# Altium PCB HandHeld_Terminal_V2_Rev3.PcbDoc (part 1 of 2)
Units mil, origin at the board's own origin, x right, y up, seen from the top; angles counter-clockwise.
Board outline 3031.5 x 1889.76 mil, 4 copper layers (Top Layer, GND_02, PWR_03, Bottom Layer), stack 63.307 mil thick; 122 components, 81 nets, 452 pads, 291 vias.
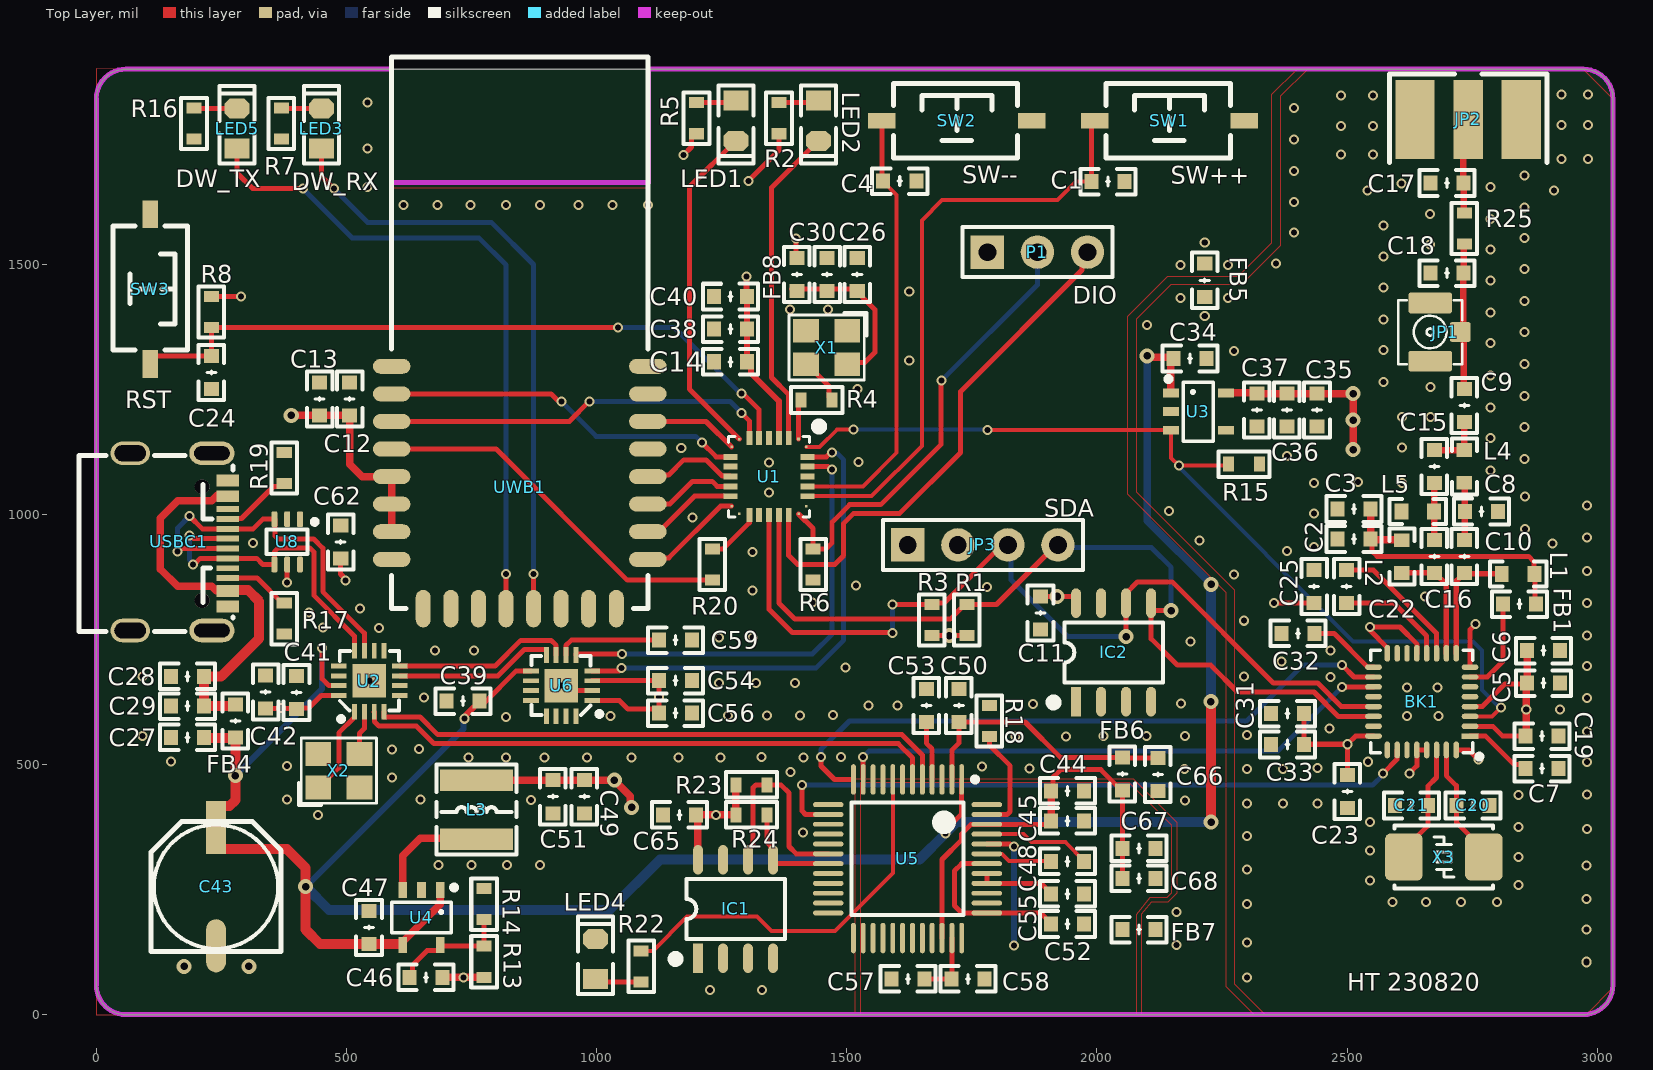
[diagram p0: Top Layer view]
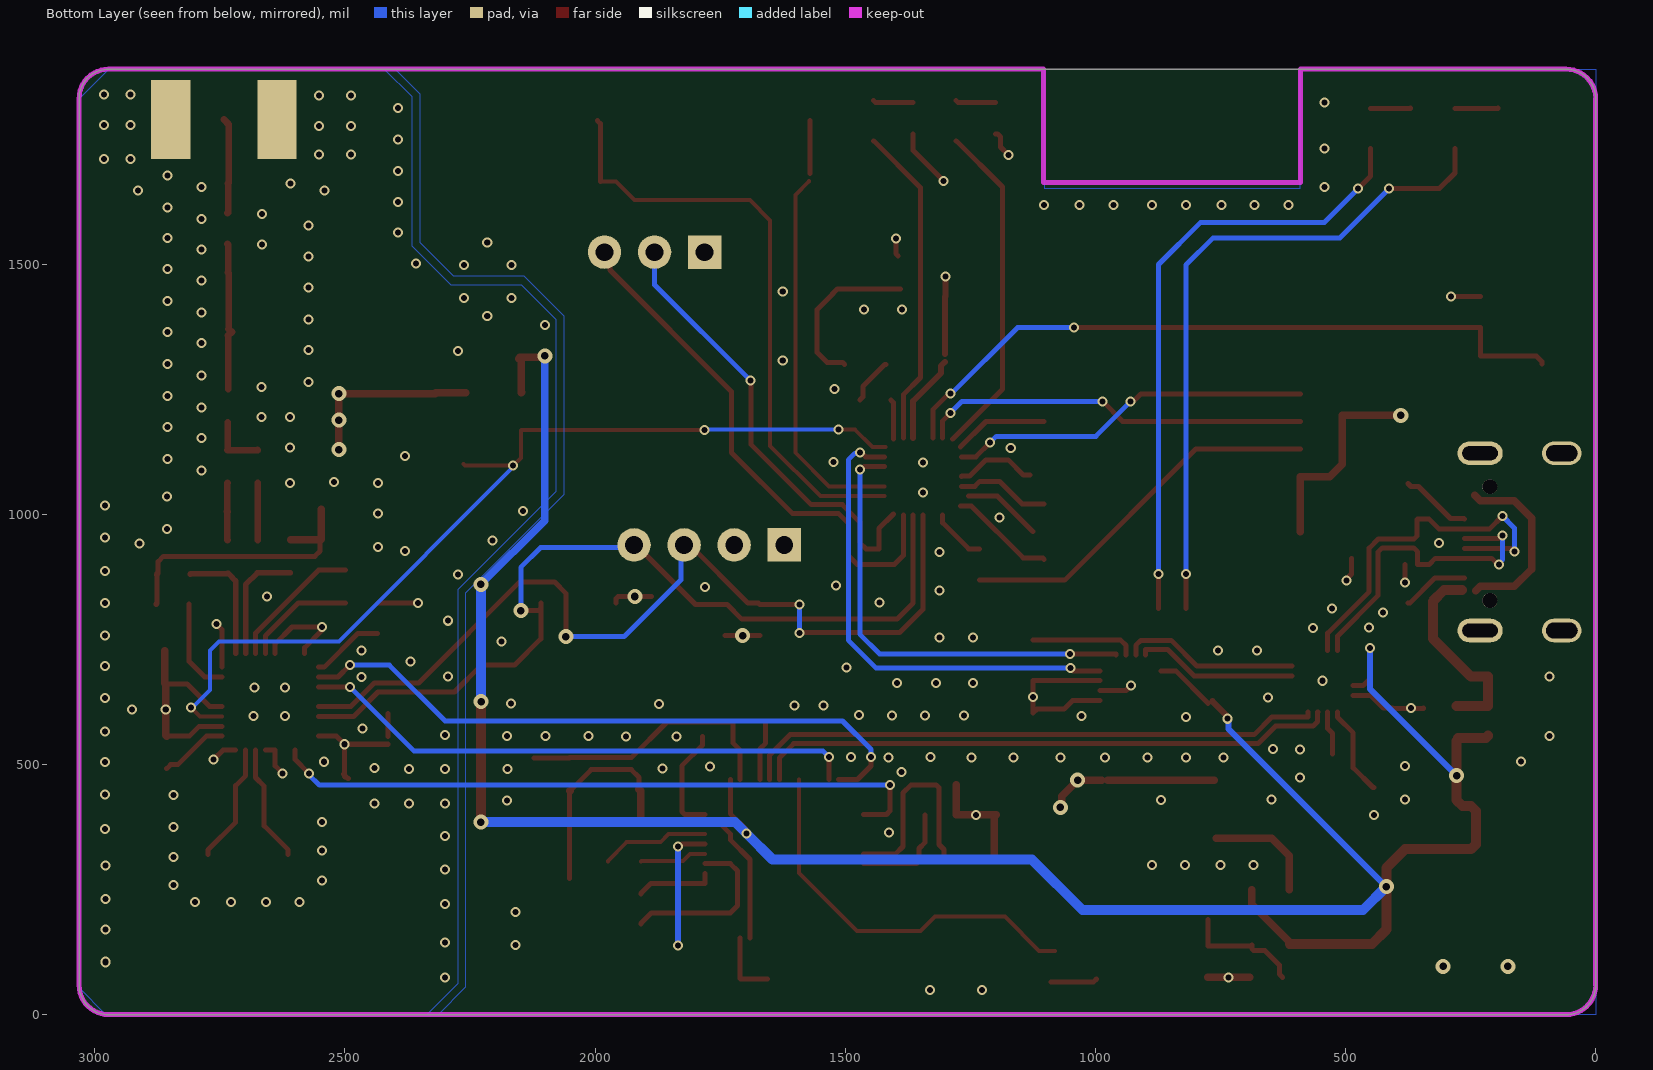
[diagram p1: Bottom Layer view, seen from below]
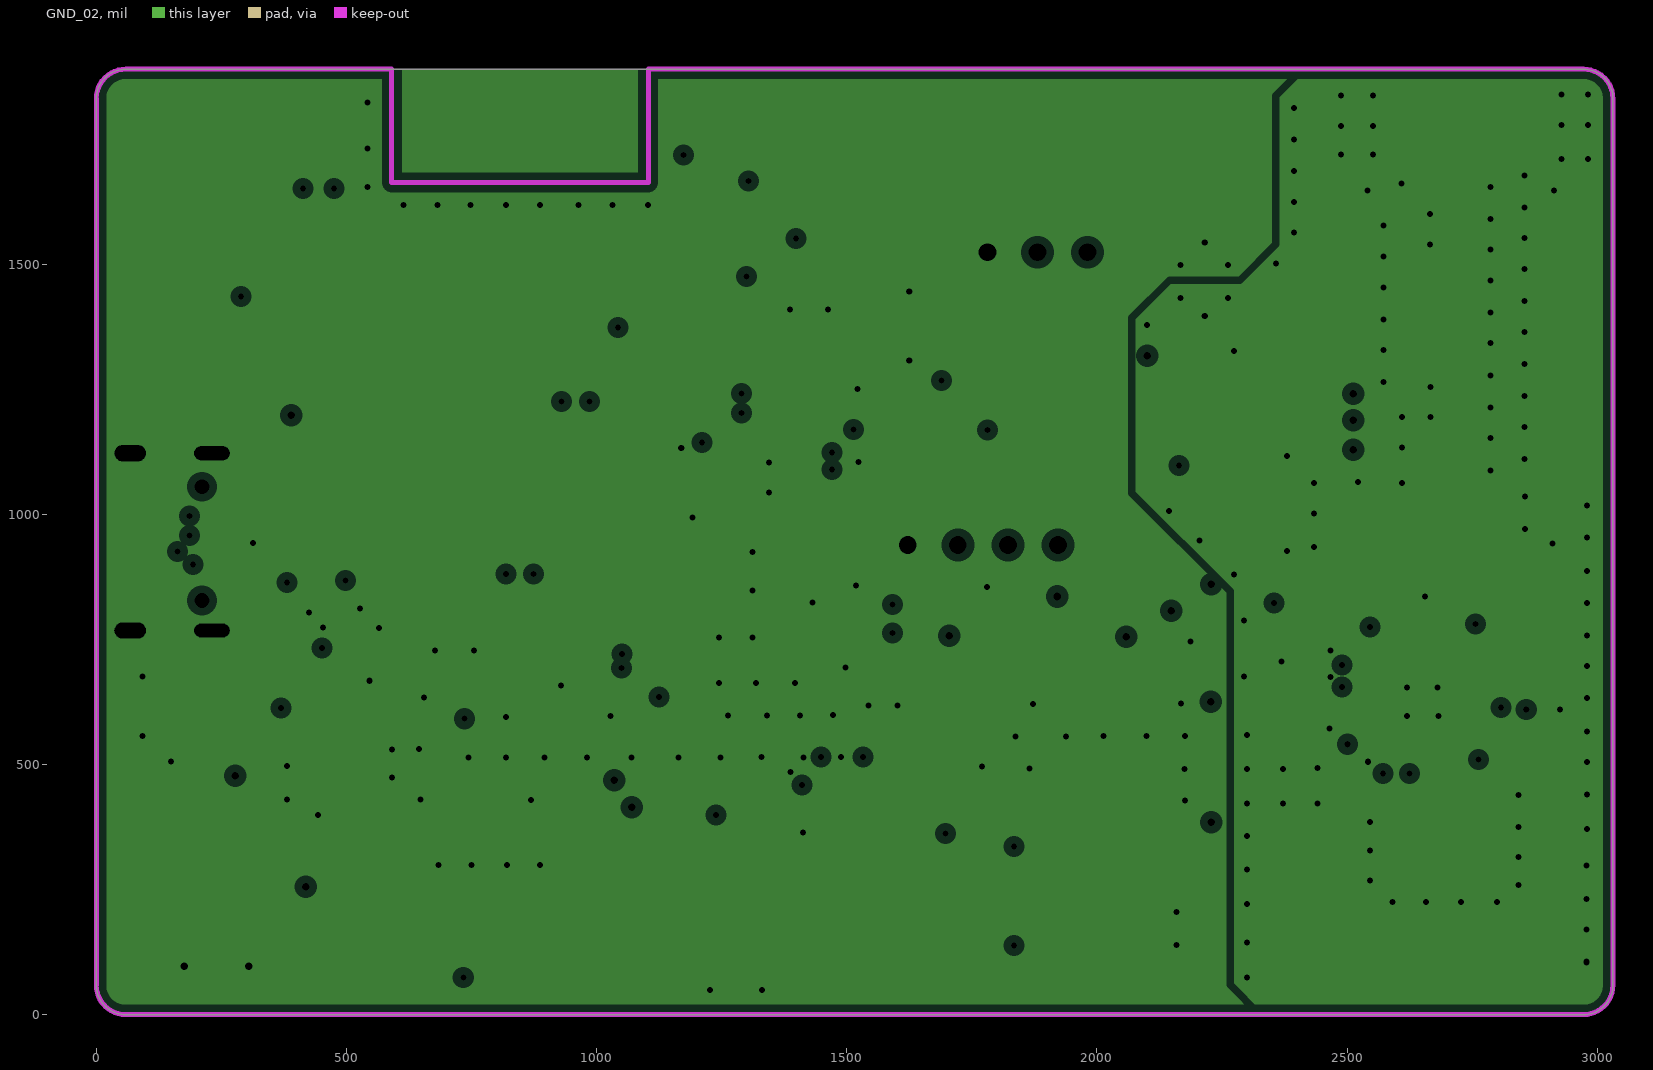
[diagram p2: GND_02, clearances drawn from the general rule]
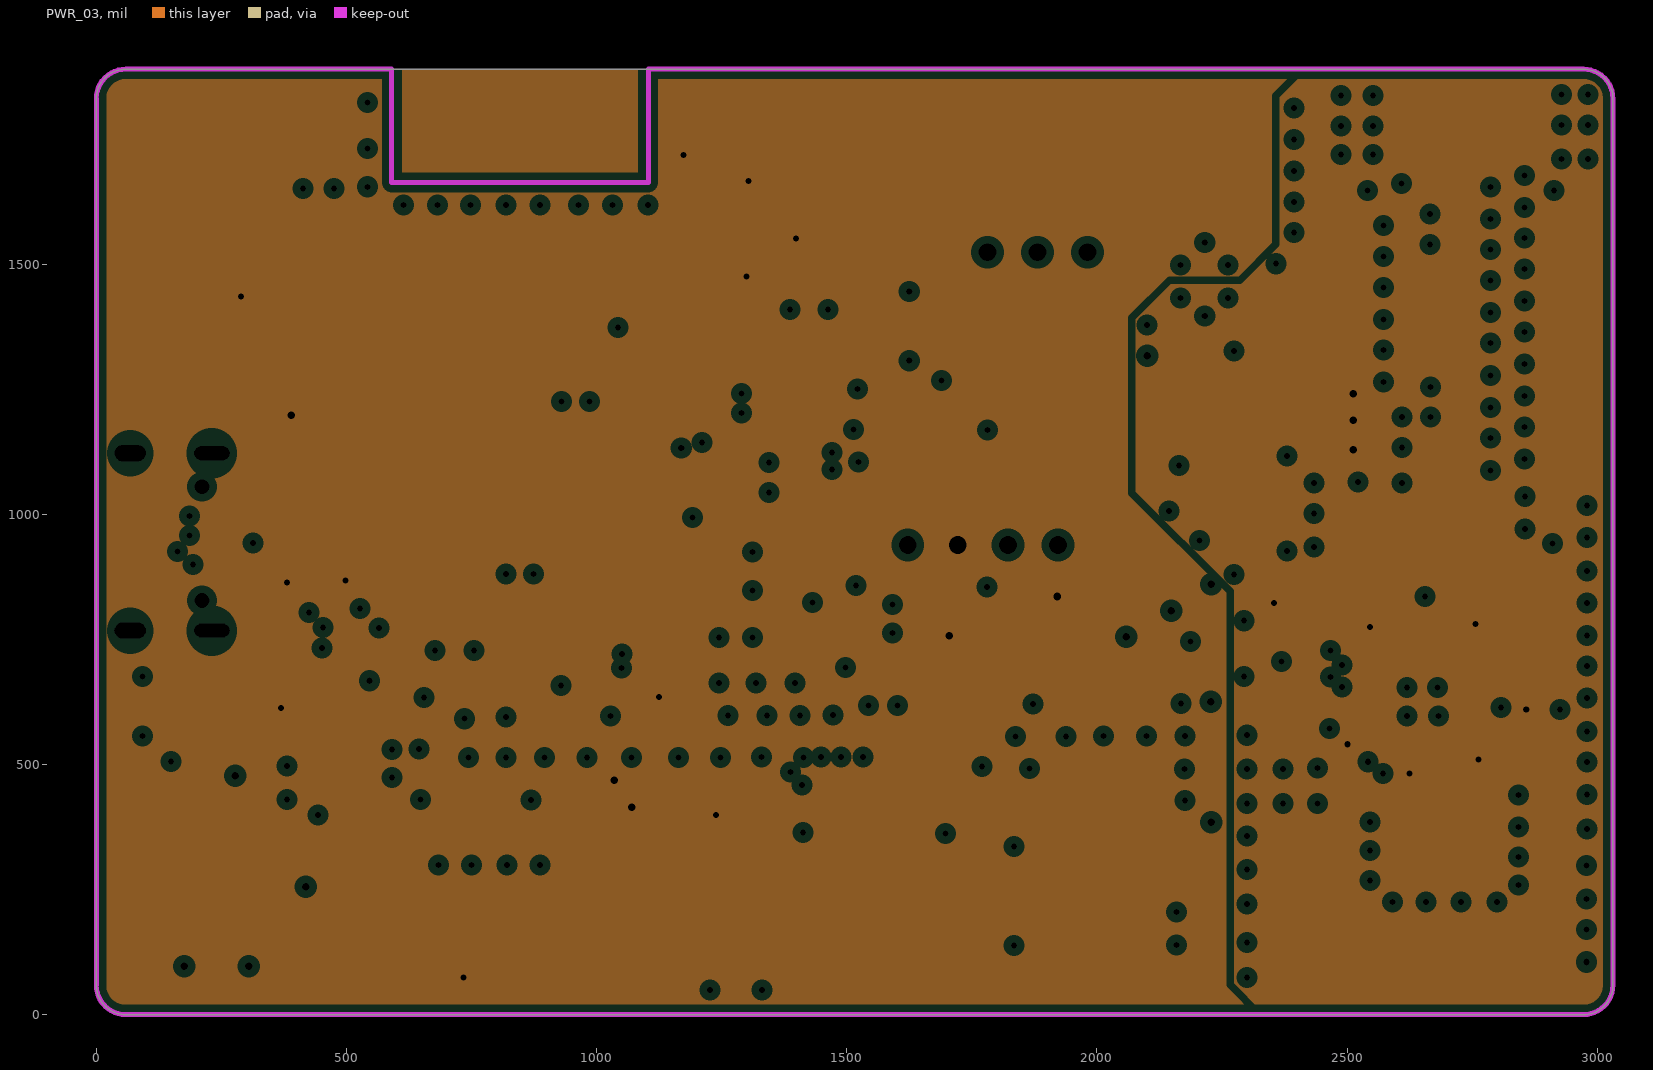
[diagram p3: PWR_03, clearances drawn from the general rule]

## Layer stack, top to bottom
Top Solder: solder mask 0.4, Solder Resist, Dk 3.5
Top Layer: signal copper 1.4
Dielectric 2: prepreg 8.6, PP-023, Dk 4.5
GND_02: plane copper 0.689, net GND
Dielectric 1: dielectric 41.9291, FR-4, Dk 4.8
PWR_03: plane copper 0.689, net (Multiple Nets)
Dielectric 3: prepreg 8.6, PP-023, Dk 4.5
Bottom Layer: signal copper 1.4
Bottom Solder: solder mask 0.4, Solder Resist, Dk 3.5

## Board outline
0,59.06 0,1830.71 cw(c59.06,1830.71) 59.06,1889.76 2972.44,1889.76 cw(c2972.44,1830.71) 3031.5,1830.71 3031.5,59.06 cw(c2972.44,59.06) 2972.44,0 59.06,0 cw(c59.06,59.06)

## Design rules (kind name [scope] priority, off if disabled: settings)
AssemblyTestPointUsage [All] p0: scope1count=1 scope1_0_kind=Board scope1_0_value=Board scope2count=1 scope2_0_kind=Board scope2_0_value=Board commentlength=0
AssemblyTestpoint [All] p0: scope1count=1 scope1_0_kind=Board scope1_0_value=Board scope2count=1 scope2_0_kind=Board scope2_0_value=Board commentlength=0
Clearance [All] p0: scope1count=1 scope1_0_kind=Board scope1_0_value=Board scope2count=1 scope2_0_kind=Board scope2_0_value=Board commentlength=0 gap=8
Clearance Frame_Shrink [All] p0 off: scope1count=1 scope1_0_kind=Layer scope1_0_value=TOP scope2count=1 scope2_0_kind=Board scope2_0_value=Board commentlength=48 gap=20 // Protel DXP Scope 2 Expression Was: InPolygon
Clearance Chip_Pin [All] p0: scope1count=1 scope1_0_kind=Component scope1_0_value=BK1','USBC1','U1 scope2count=1 scope2_0_kind=Board scope2_0_value=Board commentlength=0 gap=6
Clearance RF_Pour_Clearance [All] p0 off: scope1count=1 scope1_0_kind=NetClass scope1_0_value=RF scope2count=1 scope2_0_kind=Board scope2_0_value=Board commentlength=48 gap=15 // Protel DXP Scope 2 Expression Was: InPolygon
Clearance RF_Pour_Clearance [InNetClass('RF') vs InPolygon] p1: gap=15 ignorepadtopadclearanceinfootprint=TRUE
Clearance Chip_Pin [InComponent('BK1','USBC1','U1')] p2: gap=6 ignorepadtopadclearanceinfootprint=TRUE
Clearance Frame_Shrink [OnLayer('Keep-Out Layer') vs InPolygon] p3: gap=20 ignorepadtopadclearanceinfootprint=FALSE
Clearance [All] p4: gap=8 ignorepadtopadclearanceinfootprint=TRUE
ComponentClearance [All] p0: scope1count=1 scope1_0_kind=Board scope1_0_value=Board scope2count=1 scope2_0_kind=Board scope2_0_value=Board commentlength=0 gap=10 collisioncheckmode=3
DiffPairsRouting [All] p0: scope1count=1 scope1_0_kind=Board scope1_0_value=Board scope2count=1 scope2_0_kind=Board scope2_0_value=Board commentlength=0
DiffPairsRouting [All] p1: maxlimit=10 minlimit=10 mostfreqgap=10 toplayer_minwidth=8 toplayer_maxwidth=15 toplayer_prefwidth=8 bottomlayer_minwidth=8 bottomlayer_maxwidth=15 bottomlayer_prefwidth=8 maxuncoupledlength=500
FabricationTestPointUsage [All] p0: scope1count=1 scope1_0_kind=Board scope1_0_value=Board scope2count=1 scope2_0_kind=Board scope2_0_value=Board commentlength=0 valid=0 allowmultiple=FALSE
FabricationTestpoint [All] p0: scope1count=1 scope1_0_kind=Board scope1_0_value=Board scope2count=1 scope2_0_kind=Board scope2_0_value=Board commentlength=0 side=3 testpointundercomponent=TRUE minsize=40 maxsize=100 preferedsize=60 minholesize=0 maxholesize=40 preferedholesize=32 testpointgrid=1
FanoutControl Fanout_Default [All] p0: scope1count=1 scope1_0_kind=Board scope1_0_value=Board scope2count=1 scope2_0_kind=Board scope2_0_value=Board commentlength=30 // Fanout_Default (Default Rule)
FanoutControl Fanout_Small [All] p0 off: scope1count=1 scope1_0_kind=Board scope1_0_value=Board scope2count=1 scope2_0_kind=Board scope2_0_value=Board commentlength=84 // Protel DXP Scope 1 Expression Was: (CompPinCount < 5)   Fanout_Small (Default Rule)
FanoutControl Fanout_SOIC [All] p0 off: scope1count=1 scope1_0_kind=Board scope1_0_value=Board scope2count=1 scope2_0_kind=Board scope2_0_value=Board commentlength=71 // Protel DXP Scope 1 Expression Was: IsSOIC   Fanout_SOIC (Default Rule)
FanoutControl Fanout_LCC [All] p0 off: scope1count=1 scope1_0_kind=Board scope1_0_value=Board scope2count=1 scope2_0_kind=Board scope2_0_value=Board commentlength=69 // Protel DXP Scope 1 Expression Was: IsLCC   Fanout_LCC (Default Rule)
FanoutControl Fanout_BGA [All] p0 off: scope1count=1 scope1_0_kind=Board scope1_0_value=Board scope2count=1 scope2_0_kind=Board scope2_0_value=Board commentlength=69 // Protel DXP Scope 1 Expression Was: IsBGA   Fanout_BGA (Default Rule)
Height [All] p0: scope1count=1 scope1_0_kind=Board scope1_0_value=Board scope2count=1 scope2_0_kind=Board scope2_0_value=Board commentlength=0
HoleSize [All] p0: scope1count=1 scope1_0_kind=Board scope1_0_value=Board scope2count=1 scope2_0_kind=Board scope2_0_value=Board commentlength=0 absolutevalues=TRUE maxlimit=100 minlimit=1 maxpercent=80.000 minpercent=20.000
HoleToHoleClearance [All] p0: scope1count=1 scope1_0_kind=Board scope1_0_value=Board scope2count=1 scope2_0_kind=Board scope2_0_value=Board commentlength=0
LayerPairs [All] p0: scope1count=1 scope1_0_kind=Board scope1_0_value=Board scope2count=1 scope2_0_kind=Board scope2_0_value=Board commentlength=0 enforce=TRUE
MatchedLengths DiffPair_MatchedLengths [All] p0 off: scope1count=1 scope1_0_kind=Board scope1_0_value=Board scope2count=1 scope2_0_kind=Board scope2_0_value=Board commentlength=64 tolerance=1000 amplitude=200 gap=20 style=90-Degree // Protel DXP Scope 1 Expression Was: InDifferentialPair ('UD')
MatchedLengths DiffPair_MatchedLengths [InDifferentialPair ('UD')] p1: tolerance=1000 checknetsindiffpair=FALSE checkdiffpairvsdiffpair=TRUE checkxsignals=TRUE checkothers=TRUE
MinimumSolderMaskSliver [All] p0: scope1count=1 scope1_0_kind=Board scope1_0_value=Board scope2count=1 scope2_0_kind=Board scope2_0_value=Board commentlength=0
MinimumSolderMaskSliver [All] p1: minsoldermaskwidth=0
NetAntennae [All] p0: scope1count=1 scope1_0_kind=Board scope1_0_value=Board scope2count=1 scope2_0_kind=Board scope2_0_value=Board commentlength=0
PasteMaskExpansion [All] p0: scope1count=1 scope1_0_kind=Board scope1_0_value=Board scope2count=1 scope2_0_kind=Board scope2_0_value=Board commentlength=0 expansion=0
PlaneClearance [All] p0: scope1count=1 scope1_0_kind=Board scope1_0_value=Board scope2count=1 scope2_0_kind=Board scope2_0_value=Board commentlength=0 clearance=15
PlaneClearance [All] p1: clearance=15
PlaneConnect [All] p0: scope1count=1 scope1_0_kind=Board scope1_0_value=Board scope2count=1 scope2_0_kind=Board scope2_0_value=Board commentlength=0 planeconnectstyle=Direct reliefexpansion=20 reliefentries=4 reliefconductorwidth=15 reliefairgap=10
PlaneConnect [All] p1: planeconnectstyle=Direct reliefexpansion=20 reliefentries=4 reliefconductorwidth=15 reliefairgap=10
PolygonConnect [All] p0: scope1count=1 scope1_0_kind=Board scope1_0_value=Board scope2count=1 scope2_0_kind=Board scope2_0_value=Board commentlength=0 connectstyle=Relief reliefconductorwidth=15 reliefentries=4 polygonreliefangle="90 Angle"
PolygonConnect PolygonConnect_RF [All] p0: scope1count=1 scope1_0_kind=ComponentClass scope1_0_value=RF_Comp scope2count=1 scope2_0_kind=Board scope2_0_value=Board commentlength=0 connectstyle=Direct reliefconductorwidth=10 reliefentries=4 polygonreliefangle="90 Angle"
PolygonConnect PolygonConnect_RF [InComponentClass('RF_Comp')] p1: connectstyle=Direct reliefconductorwidth=10 reliefentries=4 polygonreliefangle="90 Angle" airgapwidth=10
PolygonConnect [All] p2: thpad.connectstyle=Relief thpad.reliefconductorwidth=15 thpad.reliefentries=4 thpad.polygonreliefangle="90 Angle" thpad.airgapwidth=10 smdpad.connectstyle=Relief smdpad.reliefconductorwidth=10 smdpad.reliefentries=4 smdpad.polygonreliefangle="90 Angle" smdpad.airgapwidth=10 via.connectstyle=Direct via.reliefconductorwidth=10 via.reliefentries=4 via.polygonreliefangle="90 Angle" via.airgapwidth=10
RoutingCorners [All] p0: scope1count=1 scope1_0_kind=Board scope1_0_value=Board scope2count=1 scope2_0_kind=Board scope2_0_value=Board commentlength=0 cornerstyle=45-Degree minsetback=100 maxsetback=100
RoutingLayers [All] p0: scope1count=1 scope1_0_kind=Board scope1_0_value=Board scope2count=1 scope2_0_kind=Board scope2_0_value=Board commentlength=0 top layer=Automatic bottom layer=Automatic
RoutingPriority [All] p0: scope1count=1 scope1_0_kind=Board scope1_0_value=Board scope2count=1 scope2_0_kind=Board scope2_0_value=Board commentlength=0
RoutingTopology [All] p0: scope1count=1 scope1_0_kind=Board scope1_0_value=Board scope2count=1 scope2_0_kind=Board scope2_0_value=Board commentlength=0 topology=Shortest
RoutingVias [All] p0: scope1count=1 scope1_0_kind=Board scope1_0_value=Board scope2count=1 scope2_0_kind=Board scope2_0_value=Board commentlength=0 holewidth=12 width=20 viastyle="Through Hole" minholewidth=12 minwidth=18 maxholewidth=25 maxwidth=50
RoutingVias [All] p1: holewidth=12 width=20 viastyle="Through Hole" minholewidth=12 minwidth=18 maxholewidth=25 maxwidth=50
ShortCircuit [All] p0: scope1count=1 scope1_0_kind=Board scope1_0_value=Board scope2count=1 scope2_0_kind=Board scope2_0_value=Board commentlength=0 allowed=FALSE
SilkToBoardRegionClearance [All] p0: scope1count=1 scope1_0_kind=Board scope1_0_value=Board scope2count=1 scope2_0_kind=Board scope2_0_value=Board commentlength=0
SilkToSilkClearance [All] p0: scope1count=1 scope1_0_kind=Board scope1_0_value=Board scope2count=1 scope2_0_kind=Board scope2_0_value=Board commentlength=0
SilkToSilkClearance [All] p1: silktosilkclearance=0
SilkToSolderMaskClearance [All] p0 off: scope1count=1 scope1_0_kind=Board scope1_0_value=Board scope2count=1 scope2_0_kind=Board scope2_0_value=Board commentlength=44 // Protel DXP Scope 1 Expression Was: IsPad
SilkToSolderMaskClearance [IsPad] p1: minsilkscreentomaskgap=0 clearancetoexposedcopper=TRUE
SolderMaskExpansion [All] p0: scope1count=1 scope1_0_kind=Board scope1_0_value=Board scope2count=1 scope2_0_kind=Board scope2_0_value=Board commentlength=0 expansion=4
SolderMaskExpansion [All] p1: expansion=4 istentingtop=FALSE
UnRoutedNet [All] p0: scope1count=1 scope1_0_kind=Board scope1_0_value=Board scope2count=1 scope2_0_kind=Board scope2_0_value=Board commentlength=0
UnpouredPolygon [All] p0: scope1count=1 scope1_0_kind=Board scope1_0_value=Board scope2count=1 scope2_0_kind=Board scope2_0_value=Board commentlength=0
Width [All] p0: scope1count=1 scope1_0_kind=Board scope1_0_value=Board scope2count=1 scope2_0_kind=Board scope2_0_value=Board commentlength=0 maxlimit=30 minlimit=8 preferedwidth=10
Width PWR [All] p0: scope1count=1 scope1_0_kind=NetClass scope1_0_value=PWR scope2count=1 scope2_0_kind=Board scope2_0_value=Board commentlength=0 maxlimit=50 minlimit=8 preferedwidth=15
Width PWR [InNetClass('PWR')] p1: maxlimit=50 minlimit=8 preferedwidth=15
Width [All] p2: maxlimit=30 minlimit=8 preferedwidth=10
24 further rules are at their usual default settings.

## Classes and differential pairs
component class RF_Comp: C2 C3 C8 C17 C18 FB5 JP1 JP2 L5
net class RF: NetC8_2 NetC9_1 NetC9_2 NetC15_1 NetC17_1
net class PWR: 3V3 +3.3V +3.3VA GND GNDA GNDRF RF3V3 USB_5V VBUS

## Components (designator, comment, footprint, x,y, rotation, side; value= is the part's Value field where it differs from the comment)
BK1 "" "QFN32 5x5_N" 2649.32,625.58 r90 top
C1 "Cap" "C 0603_L" 2022.38,1665 r180 top
C2 "Cap" "C 0603_L" 2514.32,950.58 r0 top
C3 "Cap" "C 0603_L" 2514.32,1010.58 r0 top
C4 "Cap" "C 0603_L" 1605.95,1666 r180 top
C5 "Cap" "C 0603_L" 2892.97,662.54 r180 top
C6 "Cap" "C 0603_L" 2892.97,727.54 r180 top
C7 "Cap" "C 0603_L" 2889.32,491.58 r180 top
C8 "Cap" "C 0603_L" 2768.32,1005.58 r180 top
C9 "Cap" "C 0603_L" 2734.32,1217.09 r90 top
C10 "Cap" "C 0603_L" 2734.32,915.58 r90 top
C11 "Cap" "C 0603_L" 1887.28,802.71 r90 top
C12 "Cap" "C 0603_L" 506.54,1230.75 r90 top
C13 "Cap" "C 0603_L" 446.54,1230.75 r90 top
C14 "Cap" "C 0603_L" 1267.9,1304.89 r0 top
C15 "Cap" "C 0603_L" 2674.32,1095.58 r90 top
C16 "Cap" "C 0603_L" 2674.32,915.58 r90 top
C17 "Cap" "C 0603_L" 2699.32,1662.09 r180 top
C18 "Cap" "C 0603_L" 2699.32,1482.09 r180 top
C19 "Cap" "C 0603_L" 2889.32,556.58 r0 top
C20 "Cap" "C 0603_L" 2751.53,418 r0 top
C21 "Cap" "C 0603_L" 2628.53,418 r180 top
C22 "Cap" "C 0603_L" 2499.32,855.58 r270 top
C23 "Cap" "C 0603_L" 2500.52,445.6 r90 top
C24 "Cap" "C 0603_L" 230.08,1283.09 r90 top
C25 "Cap" "C 0603_L" 2434.32,855.58 r90 top
C26 "Cap" "C 0603_L" 1521.01,1479.07 r270 top
C27 "Cap" "C 0603_L" 182.21,554.02 r0 top
C28 "Cap" "C 0603_L" 182.21,675.93 r0 top
C29 "Cap" "C 0603_L" 182.21,616.43 r0 top
C30 "Cap" "C 0603_L" 1461.01,1479.07 r270 top
C31 "Cap" "C 0603_L" 2381.4,601.46 r0 top
C32 "Cap" "C 0603_L" 2401.75,762.25 r0 top
C33 "Cap" "C 0603_L" 2381.4,540 r0 top
C34 "Cap" "C 0603_L" 2185.84,1311.36 r0 top
C35 "Cap" "C 0603_L" 2439.84,1208.36 r270 top
C36 "Cap" "C 0603_L" 2379.84,1208.36 r270 top
C37 "Cap" "C 0603_L" 2319.84,1208.36 r90 top
C38 "Cap" "C 0603_L" 1267.53,1370.21 r0 top
C39 "Cap" "C 0603_L" 732.89,626.63 r0 top
C40 "Cap" "C 0603_L" 1267.53,1435.21 r180 top
C41 "Cap" "C 0603_L" 400.17,644.04 r90 top
C42 "Cap" "C 0603_L" 338.68,644.88 r270 top
C43 "Cap Pol1" "CM D(6.3*5.4)" 239.38,255.68 r90 top
C44 "Cap" "C 0603_L" 1941.55,447.22 r180 top
C45 "Cap" "C 0603_L" 1941.55,387.22 r180 top
C46 "Cap" "C 0603_L" 658.96,74.68 r180 top
C47 "Cap" "C 0603_L" 545.1,174.11 r90 top
C48 "Cap" "C 0603_L" 1941.55,306.22 r0 top
C49 "Cap" "C 0603_L" 975.72,435.48 r270 top
C50 "Cap" "C 0603_L" 1724.03,617.91 r270 top
C51 "Cap" "C 0603_L" 912.74,435.48 r270 top
C52 "Cap" "C 0603_L" 1941.55,181.22 r180 top
C53 "Cap" "C 0603_L" 1659.03,617.91 r270 top
C54 "Cap" "C 0603_L" 1158.08,667.62 r0 top
C55 "Cap" "C 0603_L" 1941.55,241.22 r180 top
C56 "Cap" "C 0603_L" 1158.08,602.62 r180 top
C57 "Cap" "C 0603_L" 1622.53,71.53 r0 top
C58 "Cap" "C 0603_L" 1742.53,71.53 r180 top
C59 "Cap" "C 0603_L" 1158.08,748.47 r180 top
C62 "Cap" "C 0603_L" 488.67,944.88 r270 top
C65 "Cap" "C 0603_L" 1165.48,399.37 r180 top
C66 "Cap" "C 0603_L" 2121.66,480.13 r90 top
C67 "Cap" "C 0603_L" 2083.94,332.31 r180 top
C68 "Cap" "C 0603_L" 2083.94,272.31 r180 top
FB1 "Ferrite bead" "C 0603_L" 2844.32,820.58 r180 top
FB4 "Ferrite bead" "C 0603_L" 278.15,587.02 r90 top
FB5 "Ferrite bead" "C 0603_L" 2215.56,1467.79 r270 top
FB6 "Ferrite bead" "C 0603_L" 2050.91,480.6 r270 top
FB7 "Ferrite bead" "C 0603_L" 2083.94,170 r180 top
FB8 "Ferrite bead" "C 0603_L" 1400.34,1479.07 r90 top
IC1 "24Cxx" SOP8_L 1277.77,211.22 r90 top
IC2 "24Cxx" SOP8_L 2033.38,723.97 r90 top
JP1 "IPEX 测试接口" COAXIAL/SMD/CON/V/I-PEX/W08-5801 2666.17,1364.29 r90 top
JP2 "SMA 天线接口" SMA-KE 2742.08,1789.29 r0 top
JP3 "HDR-1X4" HDR2.54-LI-4P 1772.15,938.86 r0 top
L1 "L" "L 0603" 2842,880.58 r0 top
L2 "L" "L 0603" 2609.32,915.58 r90 top
L3 "Inductor Iron" NR4018 760.1,409.55 r90 top
L4 "L" "L 0603" 2734.32,1095.58 r270 top
L5 "L" "L 0603" 2641.32,1005.58 r0 top
LED1 "黄色" "LED 0805G" 1278.34,1786.6 r270 top
LED2 "红色" "LED 0805R" 1443.34,1786.6 r270 top
LED3 "绿色" "LED 0805G" 449.92,1770.85 r90 top
LED4 "蓝色" "LED 0805B" 997.99,111.22 r90 top
LED5 "橙色" "LED 0805G" 281.33,1770.85 r90 top
P1 "Header 3" HDR2.54-LI-3P 1881.2,1524.02 r0 top
R1 "Resistor" "R 0603_L" 1739.95,788.71 r90 top
R2 "Resistor" "R 0603_L" 1364.64,1791.6 r270 top
R3 "Resistor" "R 0603_L" 1670.29,788.71 r90 top
R4 "Resistor" "R 0603_L" 1440.01,1228.36 r0 top
R5 "Resistor" "R 0603_L" 1199.64,1791.6 r270 top
R6 "Resistor" "R 0603_L" 1432.86,899.94 r270 top
R7 "Resistor" "R 0603_L" 369.92,1780.85 r270 top
R8 "Resistor" "R 0603_L" 230.08,1404.09 r90 top
R13 "Resistor" "R 0603_L" 775.1,105.68 r270 top
R14 "Resistor" "R 0603_L" 775.1,220.68 r270 top
R15 "Resistor" "R 0603_L" 2294.25,1100.28 r180 top
R16 "Resistor" "R 0603_L" 195.28,1780.85 r270 top
R17 "Resistor" "R 0603_L" 375.75,791.33 r270 top
R18 "Resistor" "R 0603_L" 1785.01,586.92 r90 top
R19 "Resistor" "R 0603_L" 375.75,1092.68 r270 top
R20 "Resistor" "R 0603_L" 1231.25,899.94 r270 top
R22 "Resistor" "R 0603_L" 1088.92,96.56 r90 top
R23 "Resistor" "R 0603_L" 1309.38,459.37 r180 top
R24 "Resistor" "R 0603_L" 1309.38,399.37 r180 top
R25 "Resistor" "R 0603_L" 2734.32,1571.09 r90 top
SW1 "3x6x5" "TSW SMD-3*6*2.5" 2145,1786.73 r0 top
SW2 "3x6x5" "TSW SMD-3*6*2.5" 1720,1786.73 r0 top
SW3 "3x6x5" "TSW SMD-3*6*2.5" 107.79,1450 r270 top
U1 "STM32G071GBU6" UFQFPN-28 1344.67,1075.49 r270 top
U2 "CH334P" QFN16 545.73,667.31 r90 top
U3 "RT9013" SOT23-5L 2202.99,1205.36 r270 top
U4 "RT8059" SOT23-5L 650.1,194.11 r180 top
U5 "SSS1700" LQFP48_L 1621.55,311.53 r270 top
U6 "CH343P" QFN16 929.13,657.54 r180 top
U8 "CH412K" SOT-363 381.65,944.88 r180 top
USBC1 "TYPE-C 2.0 -16P" USB-C-SMD_TYPE-C-USB-5 165.35,944.88 r270 top
UWB1 "UWB-X3" UWB-X3-MAX-IPEX 590.55,811.61 r270 top
X1 "XTAL" "OSC 3225-4P" 1460.01,1333.36 r180 top
X2 "12M" "OSC 3225-4P" 484.72,487.47 r0 top
X3 "24.576MHz" "OSC 5032-2P" 2693.53,315 r180 top

## Footprints (in the part's own frame and the unit in brackets; to place one, negate y for a bottom-side part, rotate by r counter-clockwise, add the part's x,y. Pads: shape width x height; smd on the part's side, far side on the other; paste and mask are expansions set on the pad)
"C 0603_L" [mil] "无极性贴片电容                                       淘宝ID:黄晶宝石"
  rect 28x30 smd: 1(-33,0) 2(33,0)
  silkscreen extent -55,-26 55,26
"CM D(6.3*5.4)" [mm] "贴片电解电容，直径6.3mm，高5.4mm           淘宝ID:黄晶宝石"
  rect 2.7x1 smd: 1(3,0)
  oval 2.7x1 smd: 2(-3,0)
  silkscreen extent -3.3,-3.3 3.3,3.3
COAXIAL/SMD/CON/V/I-PEX/W08-5801 [mm] "https://shop463601444.taobao.com"
  rrect20% 1x1.05 smd: 1(0,-1.525)
  rrect20% 1.05x2.2 smd: 2(-1.475,0) 3(1.475,0)
  silkscreen extent -1.63,-1.63 1.63,1.63
HDR2.54-LI-3P [mm] "排针，3脚"
  rect 1.7x1.7 hole 0.9: 1(-2.54,0)
  round 1.7 hole 0.9: 2(0,0) 3(2.54,0)
  silkscreen extent -3.81,-1.27 3.81,1.27
HDR2.54-LI-4P [mm] "排针，4脚"
  rect 1.7x1.7 hole 0.9: 1(-3.81,0)
  round 1.7 hole 0.9: 2(-1.27,0) 3(1.27,0) 4(3.81,0)
  silkscreen extent -5.08,-1.27 5.08,1.27
"L 0603" [mm] "小功率贴片电感        淘宝ID:黄晶宝石"
  rect 0.7x0.8 smd: 1(-0.83,0) 2(0.83,0)
  silkscreen extent -1.43,-0.64 1.43,0.64
"LED 0805B" [mil] "蓝色0805LED                                    淘宝ID:黄晶宝石"
  rect 40x50 smd: 1(-40,0)
  oct 40x50 smd: 2(40,0)
  silkscreen extent -70,-35 85,35
"LED 0805G" [mil] "绿色0805LED                              淘宝ID:黄晶宝石"
  rect 40x50 smd: 1(-40,0)
  oct 40x50 smd: 2(40,0)
  silkscreen extent -70,-35 85,35
"LED 0805R" [mil] "红色0805LED                                       淘宝ID:黄晶宝石"
  rect 40x50 smd: 1(-40,0)
  oct 40x50 smd: 2(40,0)
  silkscreen extent -70,-35 85,35
LQFP48_L [mm] "封装库来自淘宝 ID：黄晶宝石 Thin QFP, 48-Leads, Body 7x7mm, Pitch 0.5mm, IPC High Density"
  oval 1.55x0.25 smd: 1(-4.025,2.75) 2(-4.025,2.25) 3(-4.025,1.75) 4(-4.025,1.25) 5(-4.025,0.75) 6(-4.025,0.25) 7(-4.025,-0.25) 8(-4.025,-0.75) 9(-4.025,-1.25) 10(-4.025,-1.75) 11(-4.025,-2.25) 12(-4.025,-2.75) 25(4.025,-2.75) 26(4.025,-2.25) 27(4.025,-1.75) 28(4.025,-1.25) 29(4.025,-0.75) 30(4.025,-0.25) 31(4.025,0.25) 32(4.025,0.75) 33(4.025,1.25) 34(4.025,1.75) 35(4.025,2.25) 36(4.025,2.75)
  oval 0.25x1.55 smd: 13(-2.75,-4.025) 14(-2.25,-4.025) 15(-1.75,-4.025) 16(-1.25,-4.025) 17(-0.75,-4.025) 18(-0.25,-4.025) 19(0.25,-4.025) 20(0.75,-4.025) 21(1.25,-4.025) 22(1.75,-4.025) 23(2.25,-4.025) 24(2.75,-4.025) 37(2.75,4.025) 38(2.25,4.025) 39(1.75,4.025) 40(1.25,4.025) 41(0.75,4.025) 42(0.25,4.025) 43(-0.25,4.025) 44(-0.75,4.025) 45(-1.25,4.025) 46(-1.75,4.025) 47(-2.25,4.025) 48(-2.75,4.025)
  silkscreen extent -4.15,-2.85 2.85,3.55
NR4018 [mm] "4.0mm*4.0mm*1.8mm(长*宽*高）"
  rect 1.1x3.7 smd: 1(-1.5,0) 2(1.5,0)
  silkscreen extent -2.29,-2.03 2.29,2.03
"OSC 3225-4P" [mm] "3.2*2.5*0.7mm(长宽高)                         淘宝ID:黄晶宝石"
  rect 1.3x1.2 smd: 1(-1.05,-0.85) 2(1.05,-0.85) 3(1.05,0.85) 4(-1.05,0.85)
  silkscreen extent -2.03,-1.75 1.91,1.65
"OSC 5032-2P" [mil] "5mm*3.2mm*0.8mm(长*宽*高)                  淘宝ID:黄晶宝石"
  rrect30% 75x94.49 smd: 1(-80,0) 2(80,0)
  silkscreen extent -98,-63 98,63
QFN16 [mm] "3mm*3mm 封装库来自淘宝卖家 ID：黄晶宝石"
  rect 1.7x1.7 smd: 0(0,0)
  rect 0.8x0.25 smd: 1(-1.575,0.75) 2(-1.575,0.25) 3(-1.575,-0.25) 4(-1.575,-0.75) 9(1.524,-0.75) 10(1.524,-0.25) 11(1.524,0.25) 12(1.524,0.75)
  rect 0.25x0.8 smd: 5(-0.75,-1.55) 6(-0.25,-1.55) 7(0.25,-1.55) 8(0.75,-1.55) 13(0.75,1.55) 14(0.25,1.55) 15(-0.25,1.55) 16(-0.75,1.55)
  silkscreen extent -2.07,-1.5 1.5,1.56
"QFN32 5x5_N" [mm] "32脚，长x宽x高：5x5x0.95mm，脚距：0.5mm"
  rect 0.275x0.85 smd: 1(-1.751,-2.451)
  oval 0.275x0.85 smd: 2(-1.25,-2.451) 3(-0.75,-2.451) 4(-0.25,-2.451) 5(0.25,-2.451) 6(0.75,-2.451) 7(1.25,-2.451) 8(1.75,-2.451) 17(1.75,2.451) 18(1.25,2.451) 19(0.75,2.451) 20(0.25,2.451) 21(-0.25,2.451) 22(-0.75,2.451) 23(-1.25,2.451) 24(-1.75,2.451)
  oval 0.85x0.275 smd: 9(2.451,-1.75) 10(2.451,-1.25) 11(2.451,-0.75) 12(2.451,-0.25) 13(2.451,0.25) 14(2.451,0.75) 15(2.451,1.25) 16(2.451,1.75) 25(-2.451,1.75) 26(-2.451,1.25) 27(-2.451,0.75) 28(-2.451,0.25) 29(-2.451,-0.25) 30(-2.451,-0.75) 31(-2.451,-1.25) 32(-2.451,-1.75)
  round 0.025 smd paste+0 mask+0.102: " "(0,0)
  silkscreen extent -2.92,-3.05 2.6,2.6
"R 0603_L" [mil] "1/10W贴片电阻                 淘宝ID:黄晶宝石"
  rect 22x30 smd: 1(-31,0) 2(31,0)
  silkscreen extent -51,-26 51,26
SMA-KE [mm] "SMA 偏脚射频天线座     淘宝ID:黄晶宝石"
  rect 1.5x4 smd: 1(0,0)
  rect 2x4 smd: 2(-2.7,0) 2(2.7,0)
  rect 2x4 smd far side: 3(-2.7,0) 3(2.7,0)
  silkscreen extent -4,-2.2 4,2.3
SOP8_L [mm] "5*6*1.8mm（长宽高）封装库来自淘宝卖家 ID：黄晶宝石"
  rect 1.5x0.5 smd: 1(-2.5,1.905)
  oval 1.5x0.5 smd: 2(-2.5,0.635) 3(-2.5,-0.635) 4(-2.5,-1.905) 5(2.5,-1.905) 6(2.5,-0.635) 7(2.5,0.635) 8(2.5,1.905)
  silkscreen extent -2.69,-2.5 1.52,3.2
SOT23-5L [mm] "3x1.6x1.1mm(长宽高) 封装库来自淘宝卖家 ID：黄晶宝石"
  rect 0.45x0.8 smd: 1(-0.95,-1.4) 2(0,-1.4) 3(0.95,-1.4) 4(0.95,1.4) 5(-0.95,1.4)
  silkscreen extent -1.78,-1.65 1.5,0.76
SOT-363 [mm]
  rrect50% 0.3x0.8 smd: 1(-0.65,-1.15) 2(0,-1.15) 3(0.65,-1.15) 4(0.65,1.15) 5(0,1.15) 6(-0.65,1.15)
  silkscreen extent -1.52,-1.14 1.05,0.63
"TSW SMD-3*6*2.5" [mm] "3*6*2.5mm"
  rect 1.4x0.8 smd: 1(-3.8,0) 2(3.8,0)
  silkscreen extent -3.21,-1.9 3.09,1.9
UFQFPN-28 [mm]
  rect 0.152x0.152 smd paste-0.064 mask+0: 1(-1.9,1.5)
  rect 0.7x0.3 smd: 2(-1.95,1) 3(-1.95,0.5) 4(-1.95,0) 5(-1.95,-0.5) 6(-1.95,-1) 16(1.95,-1) 17(1.95,-0.5) 18(1.95,0) 19(1.95,0.5) 20(1.95,1)
  rect 0.127x0.127 smd paste-0.064 mask+0: 7(-1.9,-1.5) 8(-1.5,-1.9) 14(1.5,-1.9) 15(1.9,-1.5) 21(1.9,1.5) 22(1.5,1.9) 28(-1.5,1.9)
  rect 0.3x0.7 smd: 9(-1,-1.95) 10(-0.5,-1.95) 11(0,-1.95) 12(0.5,-1.95) 13(1,-1.95) 23(1,1.95) 24(0.5,1.95) 25(0,1.95) 26(-0.5,1.95) 27(-1,1.95)
  silkscreen extent -2.74,-2.04 2.04,2.74
USB-C-SMD_TYPE-C-USB-5 [mm]
  oval 1.2x2.3 hole 0.7 slot 1.8 at 90 deg: 0(-4.5,1.675) 0(4.5,1.675)
  oval 1.2x2 hole 0.8 slot 1.6 at 90 deg: 0(-4.5,-2.475) 0(4.5,-2.475)
  rect 0.3x1.15 smd: A1(-3.263,2.473) A4(-2.462,2.471) A5(-1.162,2.475) A6(-0.162,2.475) A7(0.337,2.473) A9(2.638,2.475) A12(3.438,2.475) B1(3.138,2.475) B4(2.337,2.475) B5(1.838,2.475) B6(0.838,2.475) B7(-0.663,2.473) B9(-2.162,2.471) B12(-2.963,2.473)
  rect 0.3x1.148 smd: A8(-1.663,2.475) B8(1.337,2.475)
  round 0.75 hole 0.75 unplated: ""(-2.803,1.175) ""(2.978,1.175)
  silkscreen extent -4.38,-5.08 4.56,2.75
UWB-X3-MAX-IPEX [mil]
  oval 30x75 smd: 1(-484.25,0) 2(-429.13,0) 3(-374.02,0) 4(-318.9,0) 5(-263.78,0) 6(-208.66,0) 7(-153.54,0) 8(-98.43,0) 17(-98.43,511.81) 18(-153.54,511.81) 19(-208.66,511.81) 20(-263.78,511.81) 21(-318.9,511.81) 22(-374.02,511.81) 23(-429.13,511.81) 24(-484.25,511.81)
  oval 75x30 smd: 9(0,62.99) 10(0,118.11) 11(0,173.23) 12(0,228.35) 13(0,283.46) 14(0,338.58) 15(0,393.7) 16(0,448.82)
  silkscreen extent -1102,0 0,512

## Part data
BK1: library part BK9530
C1 C2 C3 C4 C5 C6 C7 C8 C9 C10 C11 C12 C13 C14 C15 C16 C17 C18 C19 C20 C21 C22 C23 C24 C25 C26 C27 C28 C29 C30 C31 C32 C33 C34 C35 C36 C37 C38 C39 C40 C41 C42 C44 C45 C46 C47 C48 C49 C50 C51 C52 C53 C54 C55 C56 C57 C58 C59 C62 C65 C66 C67 C68: "Capacitor"
C43: "Polarized Capacitor (Radial)"
FB1 FB4 FB5 FB6 FB7 FB8: "铁氧体磁珠"
IC1 IC2: "外置EEPROM"
JP1 JP2: library part SMA, "SMA-2.4G射频天线接口"
JP3: library part "Header 4", "4P接插件"
L1 L2 L4 L5: "小功率贴片电感"
L3: "Magnetic-Core Inductor"
LED1 LED2 LED3 LED4 LED5: library part LED-SMD, "贴片LED"
P1: "Header, 3-Pin"
SW1 SW2 SW3: library part "TSW 3x6", "3x6轻触开关"
U1: "No Description Available"
U2: library part CH334, "4·usb_hub"
U3: "LDO"
U4: "DC-DC, 2.8-5.5V,1A"
U5: "USB音频芯片"
U6: library part CH343, "USB转串口"
U8: "四路ESD保护"
USBC1: library part "USB2.0 Type-C 16Pin母座", "USB2.0 Type-C 母座 16Pin"
UWB1: library part UWB-X3(DWM3000)
X1: "4脚有源晶振"
X2: library part XTAL-4P, "4脚无源晶振"
X3: library part XTAL-2P, "2脚无源脚晶振"

## Via types
v1: diameter 20, hole 12, Top Layer to Bottom Layer, tented both sides, 273 vias
v2: diameter 30, hole 15, Top Layer to Bottom Layer, tented both sides, 18 vias

## Nets (pads, with @x,y where several pads share a name; then routed paths per layer and width w, separated by ;. In a path a pad name is that pad's centre, name@x,y a point inside that pad or via, vN(x,y) a via of type N, cw(c..) or ccw(c..) an arc to the next point about the centre after c; other vN are vias at no path point)
3V3: C11.2 C12.1 C13.1 C14.2 C38.2 C40.1 C41.1 C42.2 C46.1 C49.1 C51.1 C54.1 C56.2 C62.2 C65.1 FB8.2 IC1.8 IC2.8 JP3.2 L3.2 R1.1 R2.2 R3.1 R5.2 R8.2 R13.2 R23.2 R24.2 U1.3 U2.16 U6.1 U6.3 U8.5 UWB1.5 UWB1.6 UWB1.7 | length 2399.1
  Top Layer w10: R8.2@230.08,1435.09 v1(289.5,1435.09) ; C42.2@344.35,612.4 344.57,612.18 369.27,612.18 v1(369.57,612.47) 370.29,611.76 405.19,611.76 405.81,612.37 424.31,612.37 449.73,637.79 U2.16@484.72,637.79 ; v1(381.65,863.72) U8.5@381.65,899.61 ; C62.2@488.67,911.88 488.26,911.48 488.26,880.59 498.02,870.84 v1(498.02,868.13) ; U6.1@991.14,628.02 1045.32,628.02 1062.35,610.99 1116.71,610.99 C56.2@1125.08,602.62 v1(1125.08,635.12) C54.1@1125.08,667.62 1124.84,667.39 U6.3@991.14,667.39 ; v1(1174.05,1718.6) 1189.64,1734.2 1189.64,1754.6 1195.64,1760.6 R5.2@1199.64,1760.6 ; v1(1303.34,1666.25) 1364.64,1727.55 R2.2@1364.64,1760.6 ; FB8.2@1394.34,1516.36 1399,1521.02 v1(1399,1550.76) ; R3.1@1670.29,757.71 v2(1705.12,757.71) R1.1@1739.95,757.71 ; C11.2@1887.28,835.71 v2(1920.59,835.71) 1953.9,835.71 1958.38,831.23 IC2.8@1958.38,822.39
  Top Layer w12: v1(1299.76,1475.49) 1300.15,1475.1 1300.15,1435.45 1300.38,1435.21 1300.38,1385.52 1300.38,1320.38 ; C14.2@1300.56,1304.89 1308.62,1296.83 1308.62,1282.17 1364.35,1226.44 U1.3@1364.35,1152.26
  Top Layer w15: v2(389.75,1197.75) C13.1@446.54,1197.75 C12.1@506.54,1197.75 506.54,1100.34 531.49,1075.39 UWB1.5@590.55,1075.39 UWB1.6@590.55,1020.28 UWB1.7@590.55,965.16 ; C46.1@691.96,74.68 v1(733.53,74.68) R13.2@775.1,74.68 ; L3.2@762.05,468.48 C49.1@975.72,468.48 ; C49.1@987.22,468.48 v2(1035.58,468.48) 1067.24,436.81 1067.24,417.24 v2(1070.11,414.37) ; IC1.8@1202.77,309.64 1201.87,310.54 1201.87,395.98 C65.1@1198.48,399.37 v1(1238.43,399.37) R24.2@1278.38,399.37 R23.2@1278.38,459.37
+3.3V: C50.2 C66.2 FB6.1 U5.2 | length 548
  Top Layer w10: U5.2@1710.13,470 1710.13,528.72 1724.03,542.62 C50.2@1724.03,584.91 1856.31,584.91 1927.62,513.6 FB6.1@2050.91,513.6 2051.15,513.36 2121.42,513.36 C66.2@2121.66,513.13
+3.3VA: C44.2 C45.2 C67.2 C68.2 FB6.2 U5.34 U5.46 | length 841.5
  Top Layer w10: U5.34@1690.44,153.07 1690.44,310.02 1729.81,349.39 1729.81,361.48 1748.68,380.35 1779.93,380.35 U5.46@1780.01,380.43 1901.76,380.43 C45.2@1908.55,387.22 C45.2@1908.55,386.22 ; C44.2@1912.28,450.95 1912.28,474.3 1927.71,489.73 2007.79,489.73 FB6.2@2049.94,447.57 ; C68.2@2050.94,272.31 C67.2@2050.94,332.31 FB6.2@2050.91,447.6
  Top Layer w15: C45.2@1908.55,387.22 C44.2@1908.55,447.22 C44.2@1912.28,450.95 ; FB6.2@2049.94,447.57 FB6.2@2050.91,447.6
D_AUDIO_N: U2.3 U5.6 | length 1168.4
  Top Layer w10: U2.3@555.57,605.31 555.65,605.23 555.65,585.86 564.95,576.56 640.09,576.56 675.18,541.47 1602.99,541.47 1631.31,513.15 1631.31,470.07 U5.6@1631.39,470
D_AUDIO_P: U2.4 U5.5 | length 1166.4
  Top Layer w10: U2.4@575.26,605.31 575.26,595.18 575.34,595.1 647.01,595.1 682.63,559.47 1610.45,559.47 1651,518.92 1651,470.07 U5.5@1651.07,470
D_DATA_N: U2.7 U6.8 | length 325.9
  Top Layer w10: U2.7@606.74,677.16 802.97,677.16 856.03,730.22 893.75,730.22 894.67,729.3 899.53,729.3 899.61,729.22 U6.8@899.61,718.55
D_DATA_P: U2.8 U6.7 | length 357.5
  Top Layer w10: U2.8@606.74,696.84 797.2,696.84 848.57,748.22 908.99,748.22 919.21,738 919.21,718.63 U6.7@919.29,718.55
DW_IRQn: U1.8 UWB1.22 | length 188.7
  Top Layer w10: UWB1.22@1102.36,1185.63 1218.77,1185.63 U1.8@1269.86,1134.54
DW_MISO: U1.12 UWB1.19 | length 188.6
  Top Layer w10: UWB1.19@1102.36,1020.28 1124.86,1020.28 1125.47,1020.88 1146.68,1020.88 1191.63,1065.83 1231.16,1065.83 1241.19,1055.8 U1.12@1267.9,1055.8
DW_MOSI: U1.13 UWB1.18 | length 158.6
  Top Layer w10: UWB1.18@1124.86,965.16 1195.82,1036.12 1254.12,1036.12
DW_NSS: U1.14 UWB1.17 | length 211.6
  Top Layer w10: UWB1.17@1102.36,910.04 1105.26,912.94 1144.39,912.94 1247.88,1016.43 U1.14@1269.86,1016.43
DW_RESET: U1.6 UWB1.3 | length 782.1
  Top Layer w10: UWB1.3@590.55,1185.63 945.55,1185.63 v1(985.67,1225.75) ; v1(1289.48,1202.77) 1305.3,1186.95 U1.6@1305.3,1152.26
  Bottom Layer w10: v1(985.67,1225.75) 1266.49,1225.75 v1(1289.48,1202.77)
DW_SCK: U1.11 UWB1.20 | length 163.9
  Top Layer w10: UWB1.20@1130.38,1078.66 1144.02,1078.66 1174.31,1108.95 1218.88,1108.95 1251.43,1076.39 1266.99,1076.39 U1.11@1267.9,1075.49
DW_WUP: U1.9 UWB1.2 | length 729.5
  Top Layer w10: UWB1.2@590.55,1240.75 909.06,1240.75 924.06,1225.75 v1(929.48,1225.75) ; v1(1210.39,1143.58) 1239.12,1114.86 U1.9@1267.9,1114.86
  Bottom Layer w10: v1(929.48,1225.75) 999.24,1155.99 1197.99,1155.99 v1(1210.39,1143.58)